# Altium PCB electro3_sensor.PcbDoc
Units mm, origin at the board's own origin, x right, y up, seen from the top; angles counter-clockwise.
Board outline 100.08 x 100.08 mm, 2 copper layers (Top Layer, Bottom Layer); 21 components, 34 nets, 109 pads, 0 vias.
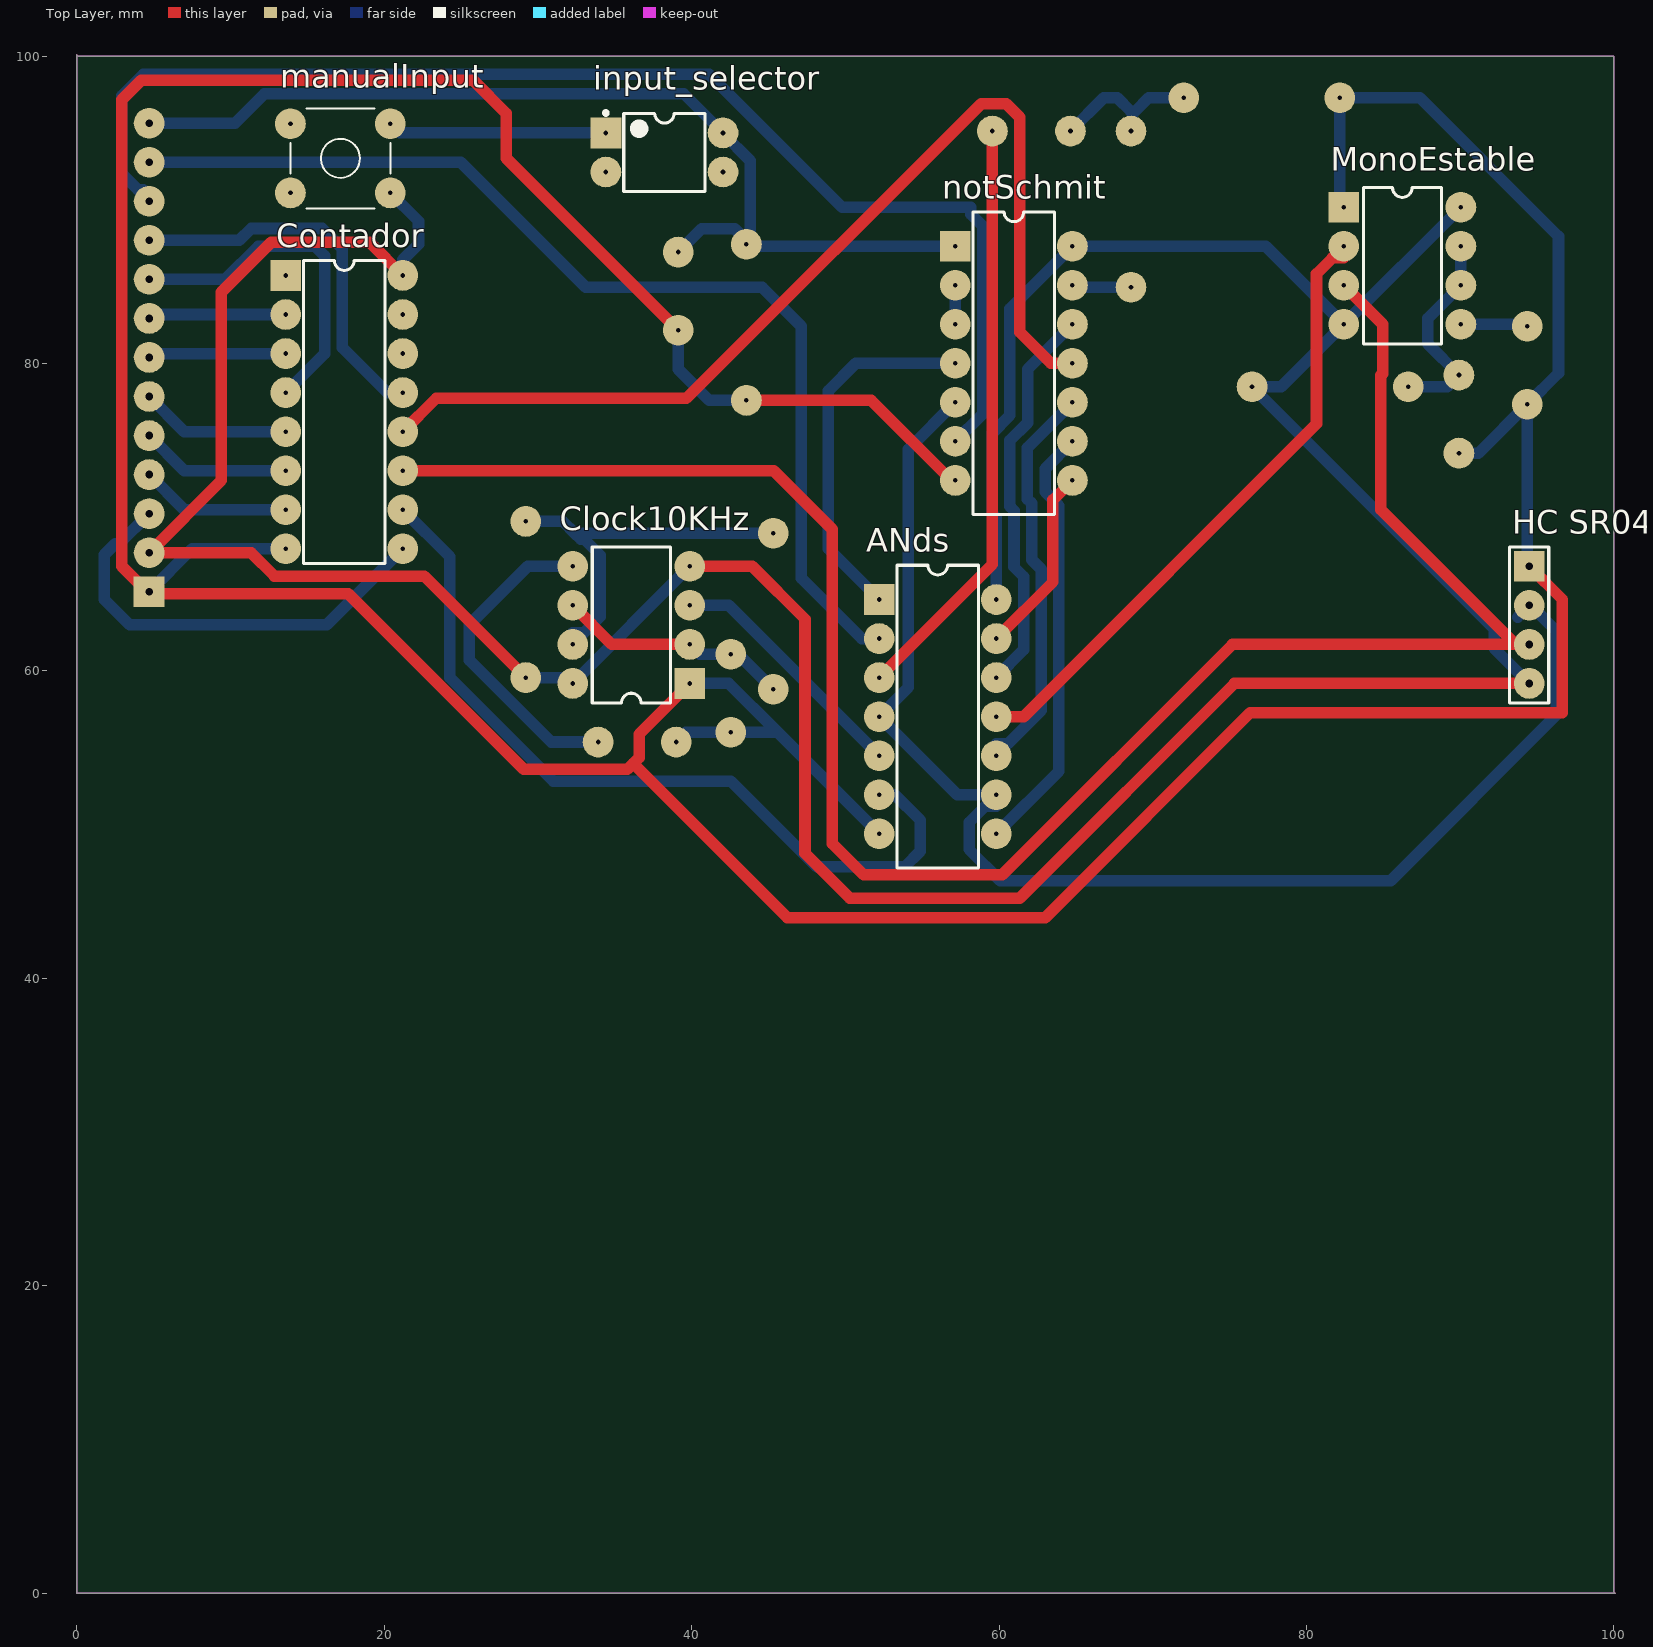
[diagram p0: Top Layer view]
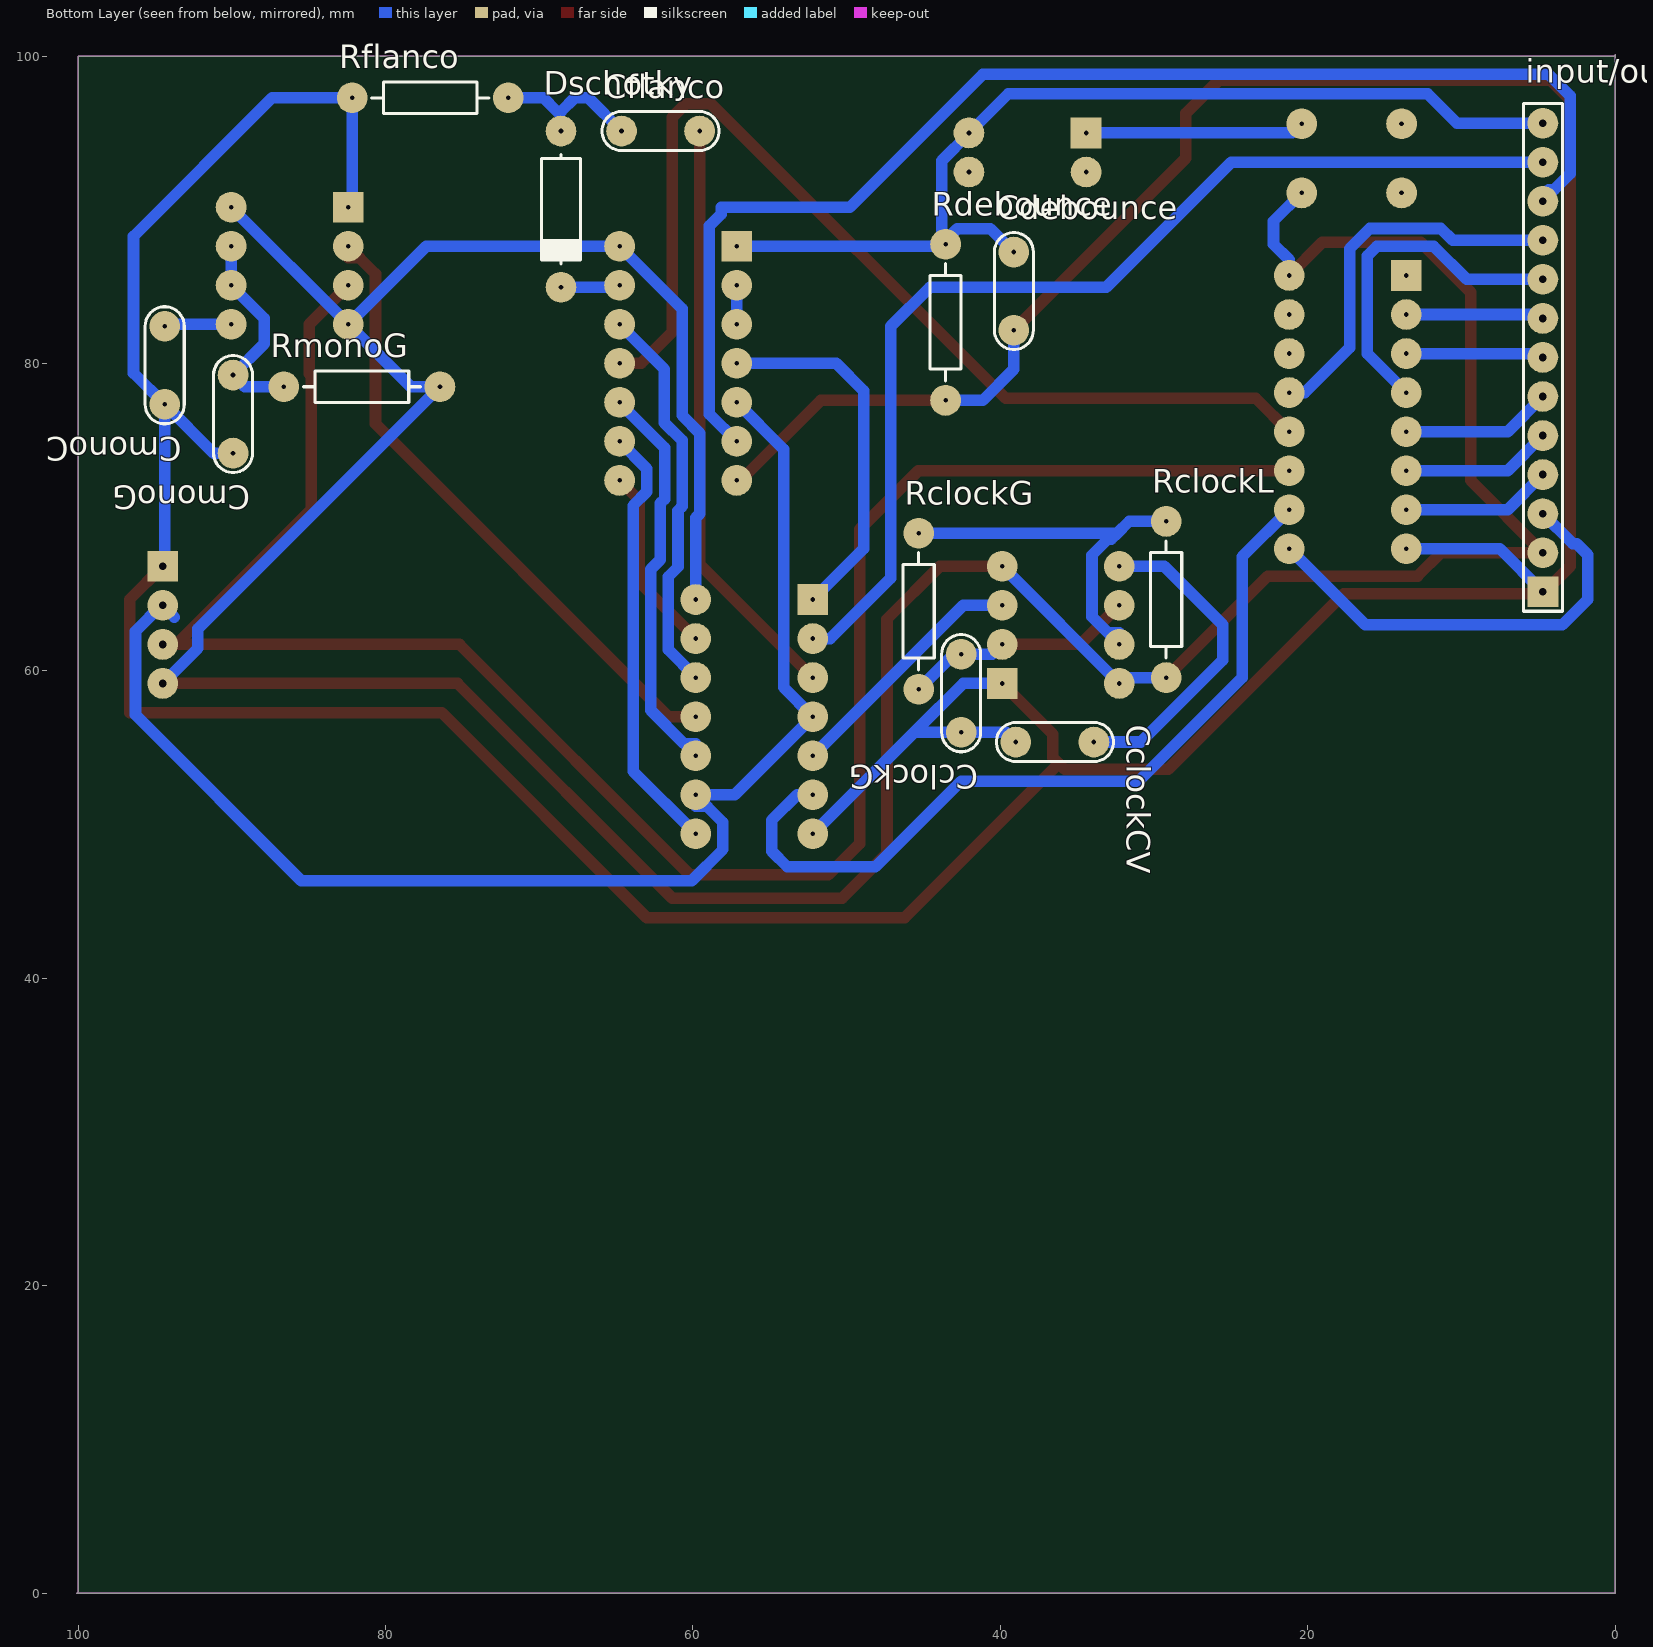
[diagram p1: Bottom Layer view, seen from below]
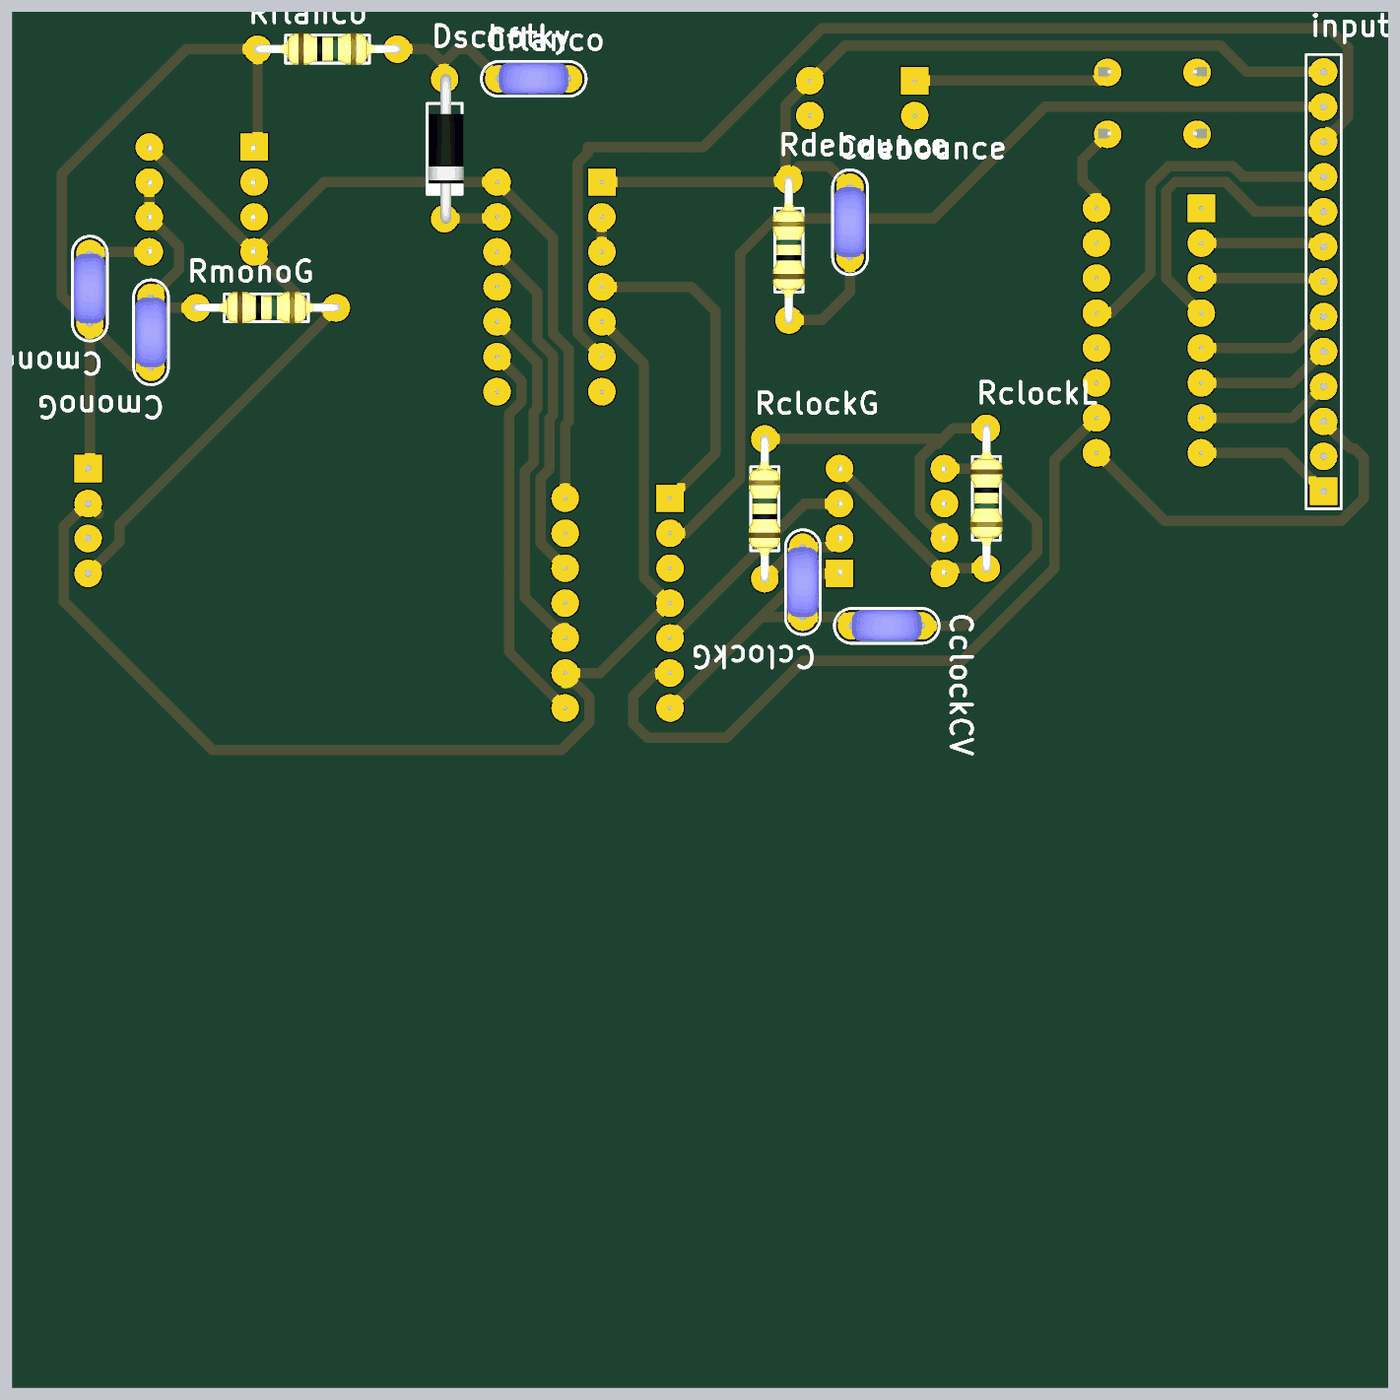
[diagram p2: 3D render of the assembled board from below, using the file's embedded part models]

## Layer stack, top to bottom
Top Solder: solder mask 0.0102, Solder Resist, Dk 3.5
Top Layer: signal copper 0.0356
Dielectric 1: dielectric 0.32, FR-4, Dk 4.8
Bottom Layer: signal copper 0.0356
Bottom Solder: solder mask 0.0102, Solder Resist, Dk 3.5

## Board outline
100.076,0 100,0.076 100,100 0.076,100 0,100.076 0,0

## Design rules (kind name [scope] priority, off if disabled: settings)
Clearance [All] p1: gap=0.4 ignorepadtopadclearanceinfootprint=FALSE
PolygonConnect [All] p1: connectstyle=Relief reliefconductorwidth=0.254 reliefentries=4 polygonreliefangle="90 Angle" airgapwidth=0.254
RoutingVias [All] p1: holewidth=0.5 width=1.8 viastyle="Through Hole" minholewidth=0.3 minwidth=1.6 maxholewidth=0.4 maxwidth=2
SolderMaskExpansion [All] p1: expansion=0.102
Width [All] p1: maxlimit=0.9 minlimit=0.6 preferedwidth=0.75
30 further rules are at their usual default settings.

## Components (designator, comment, footprint, x,y, rotation, side; value= is the part's Value field where it differs from the comment)
ANds "SN74ALS08N" N014 56.007,57.023 r270 top
CclockCV "CAP" CAP200 36.449,55.372 r0 bottom
CclockG "CAP" CAP200 42.545,58.547 r270 bottom
Cdebounce "CAP" CAP200 39.116,84.709 r270 bottom
Cflanco "CAP" CAP200 62.103,95.123 r0 bottom
Clock10KHz "LM555" DIP8 39.878,59.182 r180 top
CmonoCV "CAP" CAP200 94.361,79.883 r270 bottom
CmonoG "CAP" CAP200 89.916,76.708 r270 bottom
Contador "SN74HC4040N" N016 17.399,76.835 r270 top
Dschotky "DIODO SCHOTTKY" DO41 68.58,90.043 r270 bottom
"HC SR04" "Header 4" HDR1X4 94.488,66.802 r270 top
input/output "Header 13" HDR1X13 4.699,65.151 r90 bottom
input_selector "SW DIP-2" DIP-4 38.227,93.726 r0 top
manualInput "TACT SWITCH" TACTSWITCH 17.145,93.345 r90 top
MonoEstable "LM555" DIP8 82.423,90.17 r0 top
notSchmit "SN74AHC04N" N014 60.96,80.01 r270 top
RclockG "RES" RES400 45.312,58.801 r90 bottom
RclockL "RES" RES400 29.21,69.723 r270 bottom
Rdebounce "RES" RES400 43.561,77.597 r90 bottom
Rflanco "RES" RES400 82.169,97.282 r180 bottom
RmonoG "RES" RES400 86.614,78.486 r180 bottom

## Footprints (in the part's own frame and the unit in brackets; to place one, negate y for a bottom-side part, rotate by r counter-clockwise, add the part's x,y. Pads: shape width x height; smd on the part's side, far side on the other; paste and mask are expansions set on the pad)
CAP200 [mm]
  round 2 hole 0.3: 1(-2.54,0) 2(2.54,0)
  silkscreen extent -3.81,-1.27 3.81,1.27, body extent -2.79,-1.17 2.79,1.12, height 6.24
DIP8 [mm]
  rect 2x2 hole 0.3: 1(0,0)
  round 2 hole 0.3: 2(0,-2.54) 3(0,-5.08) 4(0,-7.62) 5(7.62,-7.62) 6(7.62,-5.08) 7(7.62,-2.54) 8(7.62,0)
  silkscreen extent 1.27,-8.89 6.35,1.27, body extent -0.06,-9.21 7.7,1.59, height 4.5
DIP-4 [mm] "DIP; 4 Leads; Row Spacing 7.62 mm; Pitch 2.54 mm"
  rect 2x2 hole 0.3: 1(-3.81,1.27)
  round 2 hole 0.3: 2(-3.81,-1.27) 3(3.81,-1.27) 4(3.81,1.27)
  silkscreen extent -3.93,-2.55 2.65,2.69, body extent -3.15,-2.5 3.15,2.5, height 5.6
DO41 [mm]
  round 2 hole 0.3: 1(-5.08,0) 2(5.08,0)
  silkscreen extent -3.56,-1.27 3.56,1.27, body extent -5.46,-1.19 5.46,1.37, height 2.03
HDR1X4 [mm] "Connector; Header; 4 Position"
  rect 2x2 hole 0.5: 1(0,0)
  round 2 hole 0.5: 2(2.54,0) 3(5.08,0) 4(7.62,0)
  silkscreen extent -1.27,-1.27 8.89,1.27
HDR1X13 [mm] "Connector; Header; 13 Position"
  rect 2x2 hole 0.5: 1(0,0)
  round 2 hole 0.5: 2(2.54,0) 3(5.08,0) 4(7.62,0) 5(10.16,0) 6(12.7,0) 7(15.24,0) 8(17.78,0) 9(20.32,0) 10(22.86,0) 11(25.4,0) 12(27.94,0) 13(30.48,0)
  silkscreen extent -1.27,-1.27 31.75,1.27
N014 [mm] "DIP; 14 Leads; Row Spacing 7.62 mm; Pitch 2.54 mm"
  rect 2x2 hole 0.3: 1(-7.62,-3.81)
  round 2 hole 0.3: 2(-5.08,-3.81) 3(-2.54,-3.81) 4(0,-3.81) 5(2.54,-3.81) 6(5.08,-3.81) 7(7.62,-3.81) 8(7.62,3.81) 9(5.08,3.81) 10(2.54,3.81) 11(0,3.81) 12(-2.54,3.81) 13(-5.08,3.81) 14(-7.62,3.81)
  silkscreen extent -9.85,-2.65 9.85,2.65
N016 [mm] "DIP; 16 Leads; Row Spacing 7.62 mm; Pitch 2.54 mm"
  rect 2x2 hole 0.3: 1(-8.89,-3.81)
  round 2 hole 0.3: 2(-6.35,-3.81) 3(-3.81,-3.81) 4(-1.27,-3.81) 5(1.27,-3.81) 6(3.81,-3.81) 7(6.35,-3.81) 8(8.89,-3.81) 9(8.89,3.81) 10(6.35,3.81) 11(3.81,3.81) 12(1.27,3.81) 13(-1.27,3.81) 14(-3.81,3.81) 15(-6.35,3.81) 16(-8.89,3.81)
  silkscreen extent -9.85,-2.65 9.85,2.65
RES400 [mm]
  round 2 hole 0.3: 1(0,0) 2(10.16,0)
  silkscreen extent 1.27,-1.02 8.89,1.02, body extent -0.3,-1.14 10.46,1.17, height 2.43
TACTSWITCH [mm]
  round 2 hole 0.3: 1(-2.25,-3.25) 2(-2.25,3.25) 3(2.25,-3.25) 4(2.25,3.25)
  silkscreen extent -3.25,-3.25 3.25,3.25, body extent -3.05,-3.95 3.15,3.95, height 7

## Part data
ANds: "Quadruple 2-Input Positive-AND Gate", ComponentLink1Description="Manufacturer Link", ComponentLink1URL=http://www.ti.com/, ComponentLink2Description=Datasheet, ComponentLink2URL=http://www-s.ti.com/sc/ds/sn74als08.pdf, ComponentLink3Description="Packaging Specification", ComponentLink3URL=http://focus.ti.com/lit/ml/mpdi002c/mpdi002c.pdf, DatasheetVersion=Dec-1994, LatestRevisionDate=04-Mar-2005, LatestRevisionNote="Stylized 3D Model Added.", PackageDescription="DIP; 14 Leads; Row Spacing 7.62 mm; Pitch 2.54 mm", PackageReference=N014, PackageVersion=Oct-1995, Published=8-Jun-2000, Publisher="Altium Limited"
Clock10KHz MonoEstable: "Timer"
Contador: "12-Bit Asynchronous Binary Counter", Code_JEDEC=MS-001-BB, ComponentLink1Description="Manufacturer Link", ComponentLink1URL=http://www.ti.com/, ComponentLink2Description=Datasheet, ComponentLink2URL=http://www-s.ti.com/sc/ds/sn74hc4040.pdf, DatasheetVersion=May-1997, LatestRevisionDate=04-Mar-2005, LatestRevisionNote="Stylized 3D Model Added.", PackageDescription="DIP; 16 Leads; Row Spacing 7.62 mm; Pitch 2.54 mm", PackageReference=N016, PackageVersion=Oct-1995, Published=8-Jun-2000, Publisher="Altium Limited"
"HC SR04": "Header, 4-Pin", LatestRevisionDate=17-Jul-2002, LatestRevisionNote="Re-released for DXP Platform.", Publisher="Altium Limited"
input/output: "Header, 13-Pin", LatestRevisionDate=17-Jul-2002, LatestRevisionNote="Re-released for DXP Platform.", Publisher="Altium Limited"
input_selector: "DIP Switch, 2 Position, SPST", LatestRevisionDate=17-Jul-2002, LatestRevisionNote="Re-released for DXP Platform.", PackageReference=DIP-4, Published=24-Mar-1999, Publisher="Altium Limited"
notSchmit: "Hex Inverter", ComponentLink1Description="Manufacturer Link", ComponentLink1URL=http://www.ti.com/, ComponentLink2Description=Datasheet, ComponentLink2URL=http://www-s.ti.com/sc/ds/sn74ahc04.pdf, ComponentLink3Description="Packaging Specification", ComponentLink3URL=http://focus.ti.com/lit/ml/mpdi002c/mpdi002c.pdf, DatasheetVersion=Jun-1998, LatestRevisionDate=04-Mar-2005, LatestRevisionNote="Stylized 3D Model Added.", PackageDescription="DIP; 14 Leads; Row Spacing 7.62 mm; Pitch 2.54 mm", PackageReference=N014, PackageVersion=Oct-1995, Published=8-Jun-2000, Publisher="Altium Limited"

## Nets (pads, with @x,y where several pads share a name; then routed paths per layer and width w, separated by ;. In a path a pad name is that pad's centre, name@x,y a point inside that pad or via, vN(x,y) a via of type N, cw(c..) or ccw(c..) an arc to the next point about the centre after c; other vN are vias at no path point)
CLOCK10KHz: ANds.5 Clock10KHz.3 | length 16.4
  Bottom Layer w0.75: Clock10KHz.3 42.418,64.262 ANds.5
echo: "HC SR04.2" ANds.4 ANds.9 notSchmit.5 | length 89.5
  Bottom Layer w0.75: notSchmit.5 54.102,74.422 54.102,58.928 ANds.4 57.277,51.943 ANds.9 59.817,51.178 59.082,51.178 58.042,50.138 58.042,48.384 60.071,46.355 85.471,46.355 96.263,57.147 96.263,62.581 94.582,64.262 94.488,64.262 93.726,63.5
GND: "HC SR04.1" ANds.7 CclockCV.2 CclockG.2 Cdebounce.2 Clock10KHz.1 CmonoCV.2 CmonoG.2 Contador.8 input/output.1 MonoEstable.1 notSchmit.7 Rdebounce.1 Rflanco.1 | length 311.8
  Top Layer w0.75: Cdebounce.2 27.94,93.345 27.94,96.266 25.781,98.425 4.191,98.425 2.924,97.158 2.924,66.805 4.578,65.151 input/output.1 4.83,65.02 17.657,65.02 29.08,53.597 35.817,53.597 36.197,53.977 ; Clock10KHz.1 36.576,55.88 36.576,54.356 36.197,53.977 ; Rdebounce.1 51.689,77.597 56.896,72.39 notSchmit.7 ; 94.488,66.802 96.647,64.643 96.647,57.277 76.327,57.277 62.992,43.942 46.231,43.942 36.197,53.977
  Bottom Layer w0.75: input/output.1 7.493,67.945 Contador.8 ; CclockCV.2 39.624,56.007 CclockG.2 45.339,56.007 45.466,56.134 ; Cdebounce.2 39.116,79.629 41.148,77.597 Rdebounce.1 ; Clock10KHz.1 42.418,59.182 45.466,56.134 ; ANds.7 45.466,56.134 ; MonoEstable.1 82.169,90.424 Rflanco.1 87.376,97.282 96.393,88.265 96.393,79.375 CmonoCV.2 ; CmonoG.2 91.186,74.168 CmonoCV.2 ; 94.488,66.802 94.361,66.929 CmonoCV.2
meas_ready: input/output.11 notSchmit.6 | length 83.7
  Bottom Layer w0.75: input/output.11 4.318,90.551 4.318,91.316 3.964,91.316 2.924,92.356 2.924,97.406 4.324,98.806 41.148,98.806 49.784,90.17 58.166,90.17 58.166,89.71 58.925,88.951 58.925,76.705 notSchmit.6
meas_req: ANds.12 notSchmit.12 | length 25.8
  Bottom Layer w0.75: ANds.12 59.817,59.593 61.592,61.368 61.592,66.137 60.967,66.762 60.967,70.43 60.695,70.702 60.695,74.992 61.856,76.153 61.856,79.636 notSchmit.12
NetANds_1: ANds.1 notSchmit.4 | length 23.9
  Bottom Layer w0.75: ANds.1 48.895,67.945 48.895,78.232 50.673,80.01 notSchmit.4
NetANds_3: ANds.3 Cflanco.1 | length 38.6
  Top Layer w0.75: ANds.3 59.563,66.929 Cflanco.1
NetANds_6: ANds.6 Contador.10 | length 53.7
  Bottom Layer w0.75: Contador.10 24.257,67.437 24.257,59.563 30.988,52.832 42.545,52.832 48.133,47.244 53.848,47.244 54.864,48.26 54.864,50.292 53.213,51.943 ANds.6
NetANds_8: ANds.8 notSchmit.9 | length 28.3
  Bottom Layer w0.75: ANds.8 63.892,53.478 63.892,70.758 62.995,71.655 62.995,73.155 notSchmit.9
NetANds_10: ANds.10 notSchmit.10 | length 26.2
  Bottom Layer w0.75: ANds.10 59.817,55.248 60.552,55.248 62.742,57.438 62.742,66.614 62.117,67.239 62.117,70.906 61.845,71.178 61.845,74.515 64.77,77.44 notSchmit.10
NetANds_13: ANds.13 notSchmit.8 | length 12.3
  Top Layer w0.75: ANds.13 63.5,65.786 63.5,71.12 notSchmit.8
NetCclockCV_1: CclockCV.1 Clock10KHz.5 | length 21.2
  Bottom Layer w0.75: Clock10KHz.5 29.337,66.802 25.527,62.992 25.527,60.706 30.861,55.372 CclockCV.1
NetCclockG_1: CclockG.1 Clock10KHz.2 Clock10KHz.6 RclockG.1 | length 15.3
  Top Layer w0.75: Clock10KHz.6 34.798,61.722 Clock10KHz.2
  Bottom Layer w0.75: Clock10KHz.2 40.513,61.087 CclockG.1 43.026,61.087 RclockG.1
NetCflanco_2: Cflanco.2 Dschotky.1 Rflanco.2 | length 9
  Bottom Layer w0.75: Cflanco.2 66.802,97.282 67.691,97.282 68.58,96.393 68.834,96.393 69.723,97.282 Rflanco.2
NetClock10KHz_7: Clock10KHz.7 RclockG.2 RclockL.1 | length 25.6
  Bottom Layer w0.75: RclockL.1 31.623,69.723 32.385,68.961 ; Clock10KHz.7 32.258,62.487 32.993,62.487 34.033,63.527 34.033,67.537 32.993,68.577 32.769,68.577 32.385,68.961 ; RclockG.2 32.385,68.961
NetCmonoCV_1: CmonoCV.1 MonoEstable.5 | length 4.4
  Bottom Layer w0.75: MonoEstable.5 94.234,82.55 CmonoCV.1
NetCmonoG_1: CmonoG.1 MonoEstable.6 MonoEstable.7 RmonoG.1 | length 13.7
  Bottom Layer w0.75: RmonoG.1 89.154,78.486 CmonoG.1 87.884,81.28 87.884,82.931 MonoEstable.6 MonoEstable.7
NetContador_2: Contador.2 input/output.8 | length 9
  Bottom Layer w0.75: input/output.8 4.953,83.185 Contador.2
NetContador_3: Contador.3 input/output.7 | length 9
  Bottom Layer w0.75: input/output.7 4.953,80.645 Contador.3
NetContador_4: Contador.4 input/output.9 | length 22.5
  Bottom Layer w0.75: input/output.9 9.652,85.471 11.811,87.63 15.494,87.63 16.129,86.995 16.129,80.645 Contador.4
NetContador_5: Contador.5 input/output.6 | length 9.8
  Bottom Layer w0.75: input/output.6 6.985,75.565 Contador.5
NetContador_6: Contador.6 input/output.5 | length 9.8
  Bottom Layer w0.75: input/output.5 6.985,73.025 Contador.6
NetContador_7: Contador.7 input/output.4 | length 9.8
  Bottom Layer w0.75: input/output.4 6.985,70.485 Contador.7
NetContador_9: Contador.9 input/output.3 | length 29.1
  Bottom Layer w0.75: input/output.3 2.743,68.275 2.489,68.275 1.778,67.564 1.778,64.643 3.429,62.992 16.256,62.992 Contador.9
NetContador_13: Contador.13 input/output.10 | length 25
  Bottom Layer w0.75: input/output.10 10.566,88.011 11.335,88.78 15.97,88.78 17.279,87.471 17.279,81.019 20.193,78.105 Contador.13
NetDschotky_2: Dschotky.2 notSchmit.13 | length 3.9
  Bottom Layer w0.75: notSchmit.13 64.897,84.963 Dschotky.2
Netinput_selector_1: input_selector.1 manualInput.3 | length 14.3
  Bottom Layer w0.75: manualInput.3 20.994,94.996 input_selector.1
NetnotSchmit_2: notSchmit.2 notSchmit.3 | length 2.5
  Bottom Layer w0.75: notSchmit.3 notSchmit.2
out_of_range: Contador.12 notSchmit.11 | length 67.6
  Top Layer w0.75: Contador.12 23.368,77.724 39.654,77.724 58.828,96.898 60.455,96.898 61.341,96.012 61.341,82.042 63.373,80.01 notSchmit.11
trigger: Cdebounce.1 input/output.13 input_selector.4 notSchmit.1 Rdebounce.2 | length 66.7
  Bottom Layer w0.75: input/output.13 10.287,95.631 12.192,97.536 39.497,97.536 input_selector.4 42.037,94.966 43.812,93.191 43.812,87.757 Rdebounce.2 ; Cdebounce.1 40.64,88.773 42.799,88.773 43.561,88.011 Rdebounce.2 ; notSchmit.1 43.688,87.63 Rdebounce.2
trigger_debugged: ANds.11 MonoEstable.2 | length 41.4
  Top Layer w0.75: ANds.11 61.595,57.023 80.648,76.076 80.648,85.825 81.688,86.865 82.423,86.865 MonoEstable.2
trigger_enable: ANds.2 input/output.12 | length 69.9
  Bottom Layer w0.75: input/output.12 24.973,93.091 33.101,84.963 44.577,84.963 47.117,82.423 47.117,66.04 51.054,62.103 ANds.2
trigger_sensor: "HC SR04.3" Contador.11 MonoEstable.3 | length 130.5
  Top Layer w0.75: Contador.11 45.339,73.025 49.149,69.215 49.149,48.768 51.181,46.736 60.198,46.736 75.184,61.722 93.605,61.722 ; MonoEstable.3 84.963,82.55 84.963,79.345 84.839,79.221 84.839,70.488 93.605,61.722 ; 94.488,61.722 93.605,61.722
VCC: "HC SR04.4" ANds.14 Clock10KHz.4 Clock10KHz.8 Contador.16 input/output.2 manualInput.1 MonoEstable.4 MonoEstable.8 notSchmit.14 RclockL.2 RmonoG.2 | length 249.8
  Top Layer w0.75: Contador.16 19.05,87.884 12.652,87.884 9.398,84.63 9.398,72.39 input/output.2 11.333,67.691 12.854,66.17 22.603,66.17 RclockL.2 ; Clock10KHz.4 43.942,66.802 47.371,63.373 47.371,48.133 50.292,45.212 61.341,45.212 75.311,59.182 94.488,59.182
  Bottom Layer w0.75: manualInput.1 22.225,89.265 22.225,87.757 21.209,86.741 Contador.16 ; RclockL.2 31.877,59.563 Clock10KHz.8 Clock10KHz.4 ; ANds.14 59.817,69.954 59.545,70.226 59.545,75.468 60.706,76.629 60.706,83.566 notSchmit.14 77.343,87.63 MonoEstable.4 ; MonoEstable.8 MonoEstable.4 ; 94.488,59.182 92.202,61.468 92.202,62.738 RmonoG.2 78.359,78.486 MonoEstable.4
pads on no net: Contador.1 Contador.14 Contador.15 input_selector.2 input_selector.3 manualInput.2 manualInput.4

## Keep-outs
Keep-Out Layer:
  the board outline again, w0.1